# Altium PCB HAT_controller.PcbDoc (part 2 of 2)
Units mm, origin at the board's own origin, x right, y up, seen from the top; angles counter-clockwise.
Board outline 64 x 85 mm, 4 copper layers (Top Layer, Ground Plane, Power Plane, Bottom Layer), stack 0.844 mm thick; 109 components, 55 nets, 306 pads, 89 vias.
Unrouted connection lines stored in the file: 3.
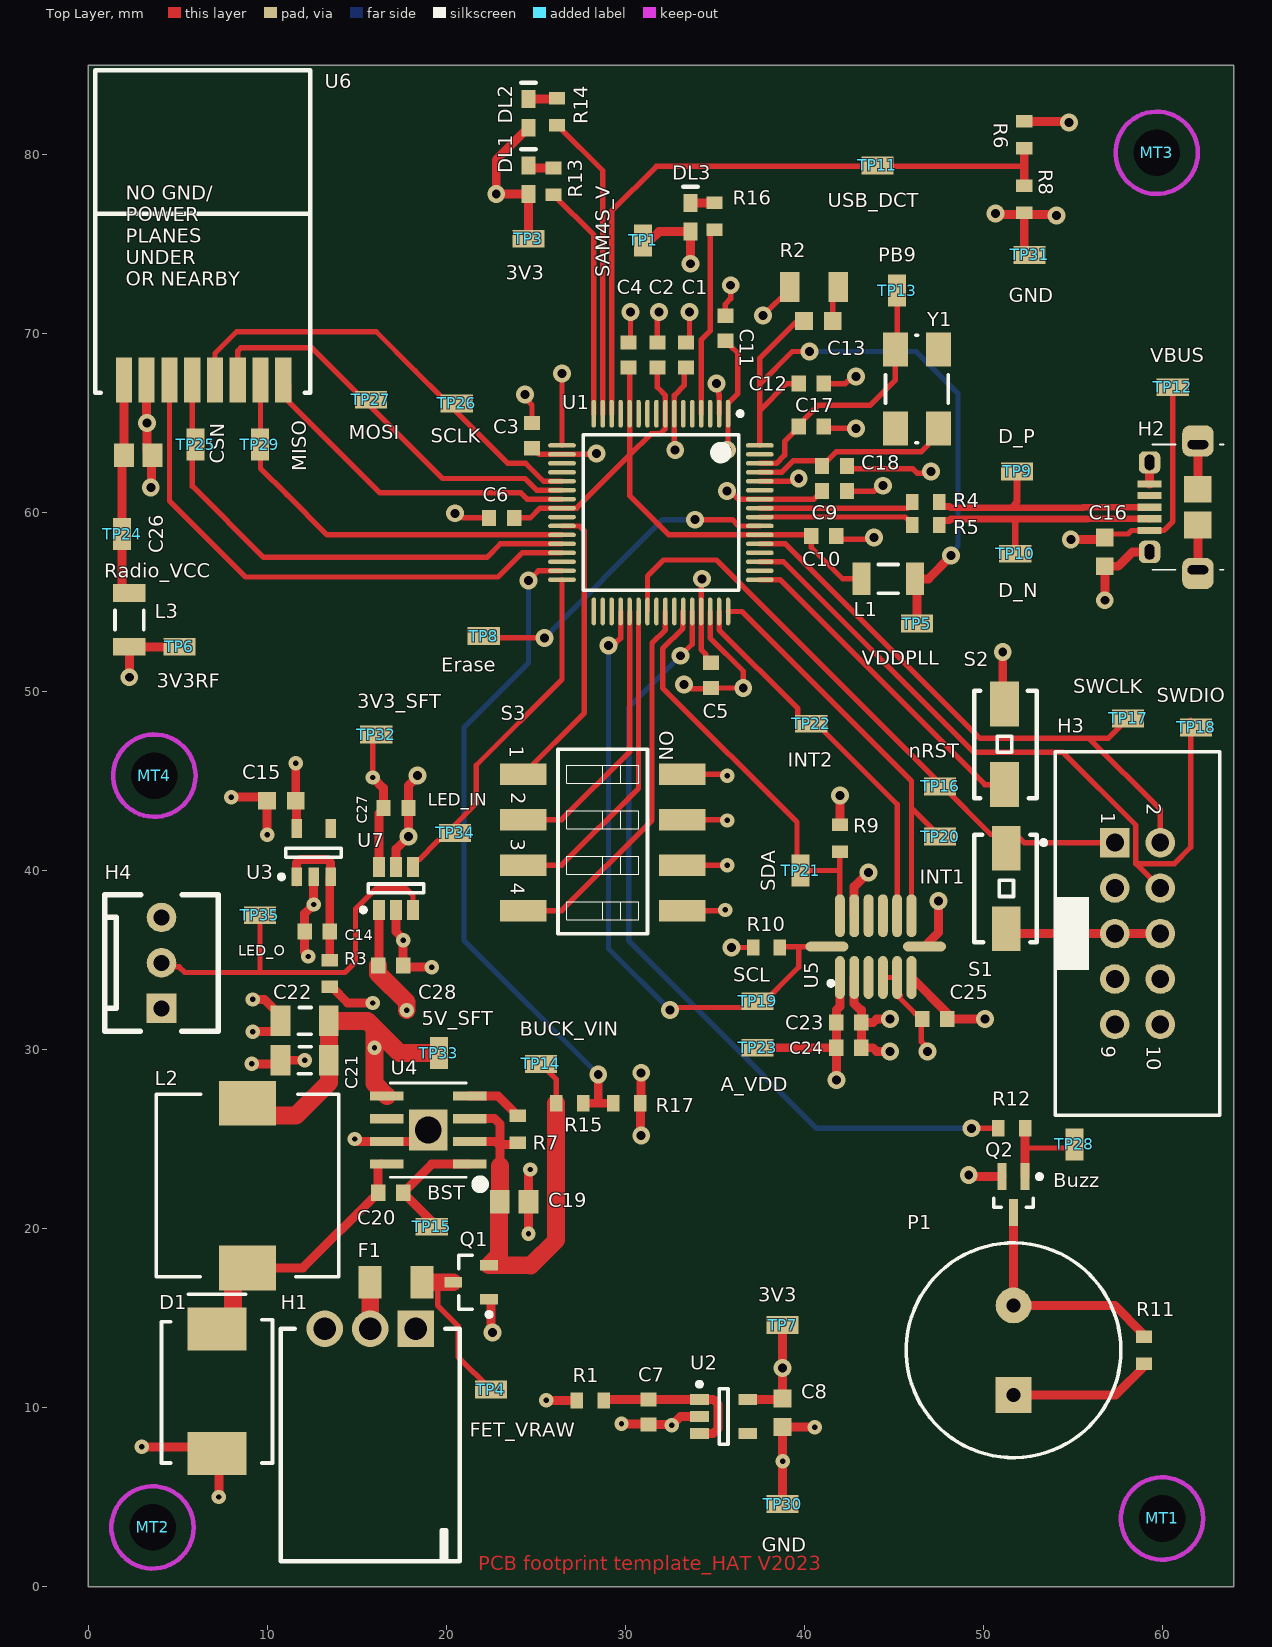
[diagram p0: Top Layer view]

## Silkscreen, mask and mechanical layers (free items; w line width, h text height)
Board Outline:
  lines w0.254: 64,0 0,0 0,85 64,85

## Dimensions
0,85 to 0,0 on Mechanical 1
64,86 to 0,86 on Mechanical 1

## Text inside footprints (layer, text, board x,y; h text height)
H2: Mechanical 1 "PCB Edge" at 64.27,58.15 h0.8 r90
H3: Top Overlay "10" at 59.15,30.2 h0.8 r270; Top Overlay "1" at 56.61,43.26 h0.8 r270; Top Overlay "2" at 59.15,43.76 h0.8 r270; Top Overlay "9" at 56.61,30.2 h0.8 r270
S3: Top Overlay "ON" at 31.9,47.8 h0.8 r270; Top Overlay "1" at 23.55,46.98 h0.8 r270; Top Overlay "2" at 23.65,44.38 h0.8 r270; Top Overlay "3" at 23.6,41.78 h0.8 r270; Top Overlay "4" at 23.625,39.305 h0.8 r270
U4: Mechanical 13 "*" at 20.93,24.344 h0.8 r180
U6: Top Overlay "NO GND/ / POWER / PLANES / UNDER / OR NEARBY" at 2.1,72.675 h0.8